# Altium PCB СхемаПолумостоваяРазводка.PcbDoc
Units mil, origin at the board's own origin, x right, y up, seen from the top; angles counter-clockwise.
Board outline 6000 x 4000 mil, 2 copper layers (Top Layer, Bottom Layer); 84 components, 45 nets, 186 pads, 0 vias.
Unrouted connection lines stored in the file: 133.
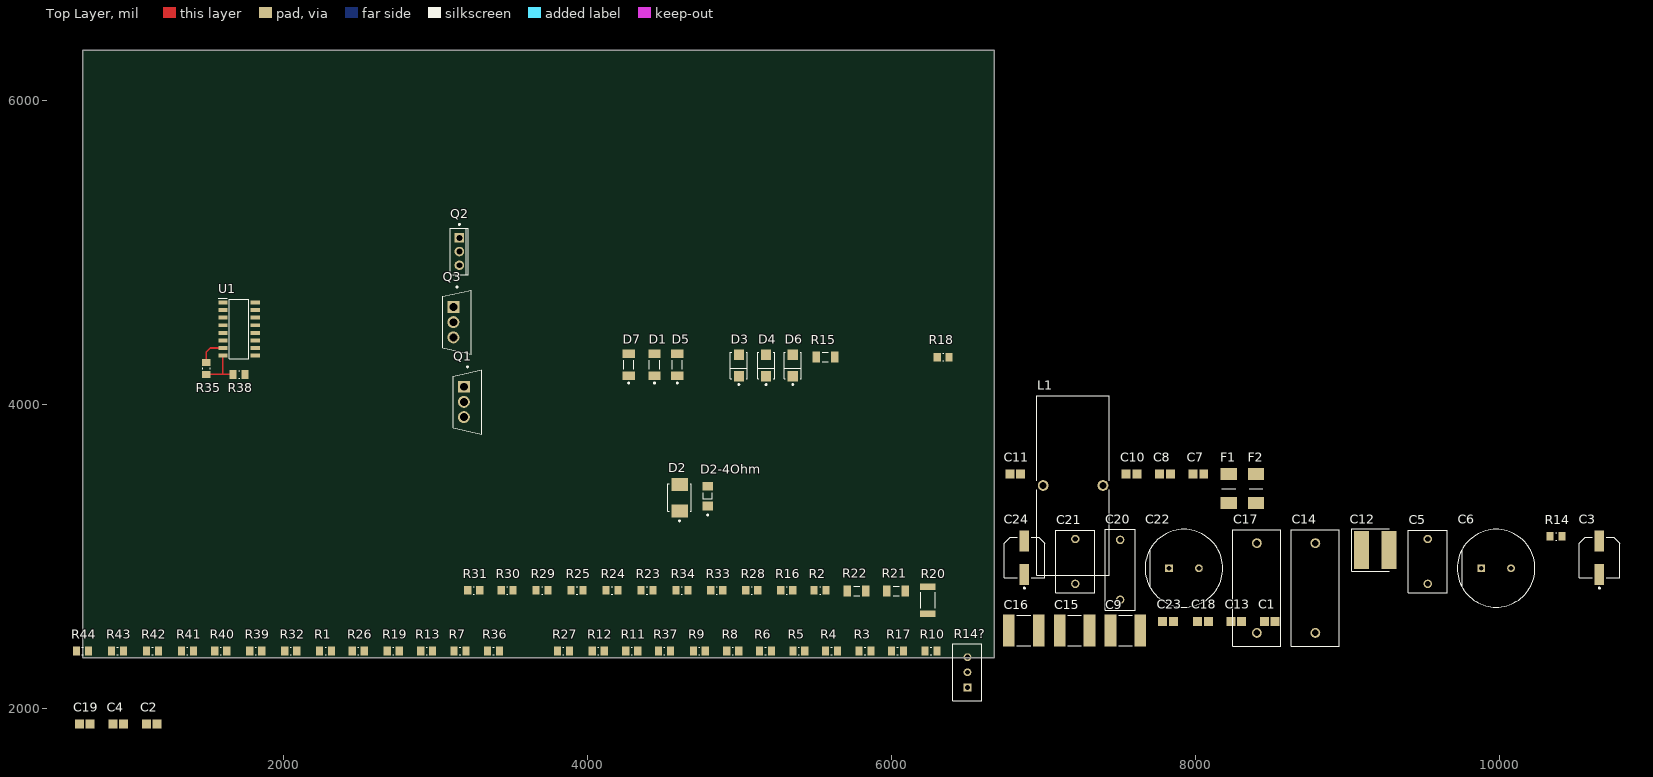
[diagram p0: Top Layer view]
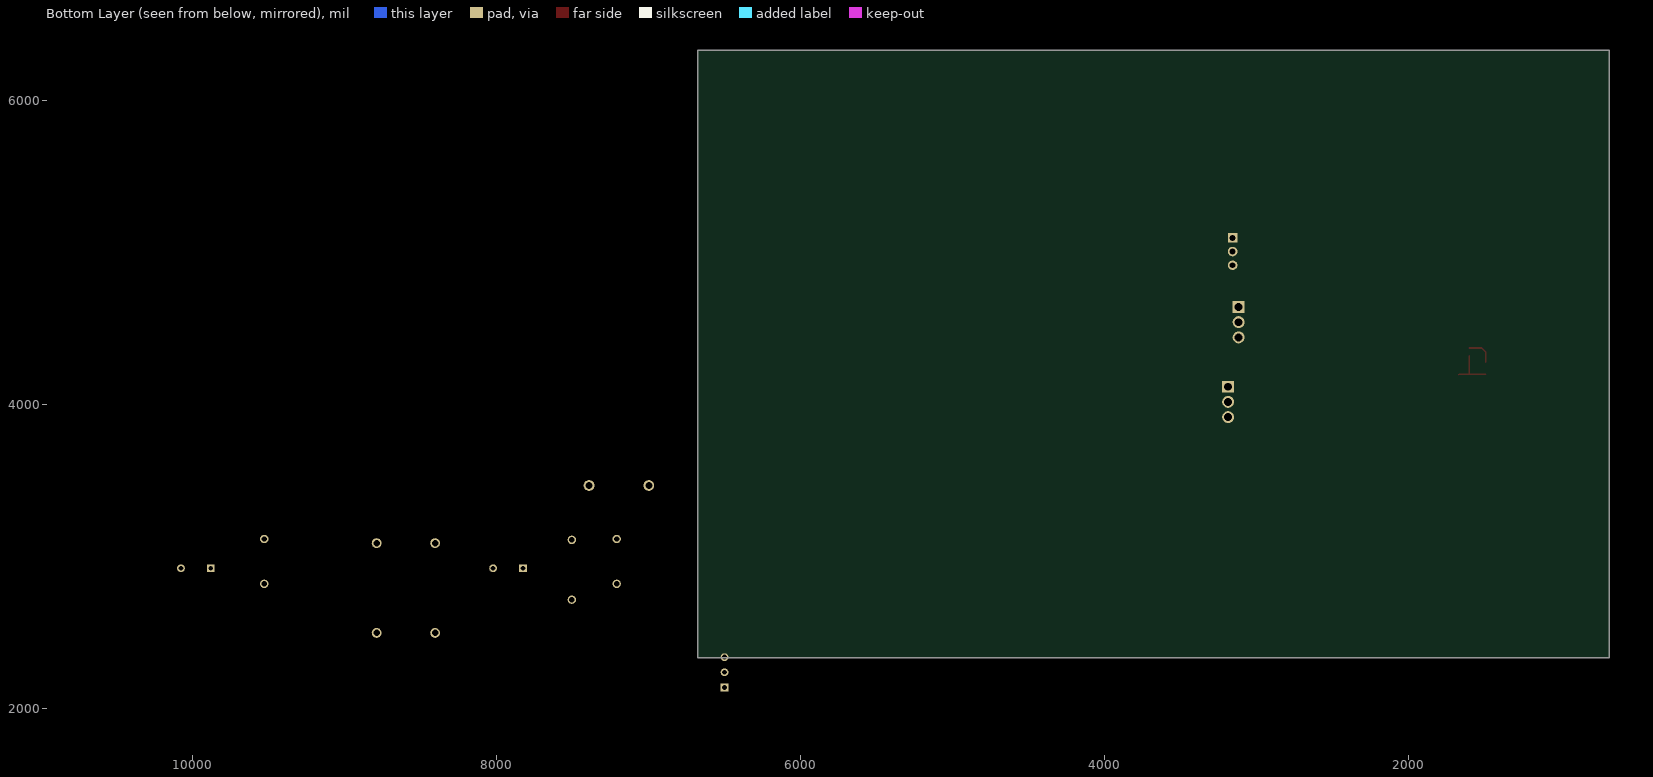
[diagram p1: Bottom Layer view, seen from below]

## Layer stack, top to bottom
Top Solder: solder mask 0.4, Solder Resist, Dk 3.5
Top Layer: signal copper 1.4
Dielectric 1: dielectric 12.6, FR-4, Dk 4.8
Bottom Layer: signal copper 1.4
Bottom Solder: solder mask 0.4, Solder Resist, Dk 3.5

## Board outline
675,2330 6675,2330 6675,6330 675,6330

## Design rules (kind name [scope] priority, off if disabled: settings)
Clearance [All] p1: gap=10 ignorepadtopadclearanceinfootprint=FALSE
PolygonConnect [All] p1: connectstyle=Relief reliefconductorwidth=10 reliefentries=4 polygonreliefangle="90 Angle" airgapwidth=10
RoutingVias [All] p1: holewidth=28 width=50 viastyle="Through Hole" minholewidth=28 minwidth=50 maxholewidth=28 maxwidth=50
SolderMaskExpansion [All] p1: expansion=4 istentingtop=FALSE
SupplyNets "Schematic Supply Nets_1" [InNet('aGND')] p1: voltage=0.000
SupplyNets "Schematic Supply Nets" [InNet('GND')] p2: voltage=0.000
Width [All] p1: maxlimit=10 minlimit=10 preferedwidth=10
30 further rules are at their usual default settings.

## Components (designator, comment, footprint, x,y, rotation, side; value= is the part's Value field where it differs from the comment)
C1 "2u2" CAPC2013X145X50ML20T25 8490,2570 r0 top
C2 "15p" CAPC2013X145X50ML20T25 1130,1895 r0 top
C3 "220u 16V" FP-OS-CON-SMT-C6-MFG 10660,2990 r90 top
C4 "220p" CAPC2013X145X50ML20T25 910,1895 r0 top
C5 "0.068Uf" WCAP-FTX2_L10W6H12_CS 9530,2965 r90 top
C6 "470uF 63V" FP-RAD-TH-D_12_5_0_5-L_20-MFG 9980,2920 r0 top
C7 "2n2" CAPC2013X145X50ML20T25 8020,3540 r0 top
C8 "2n2" CAPC2013X145X50ML20T25 7800,3540 r0 top
C9 "22uF" CAPC5950X255X70LL75T35 7540,2510 r0 top
C10 "2n2" CAPC2013X145X50ML20T25 7580,3540 r0 top
C11 "2n2" CAPC2013X145X50ML20T25 6815,3540 r0 top
C12 "TAN 47u" CAPPC5760X640N 9185,3040 r0 top
C13 "2u2" CAPC2013X145X50ML20T25 8270,2570 r0 top
C14 "1uf 100V" WCAP-FTBP_L18W7H13 8790,2790 r90 top
C15 "22uF" CAPC5950X255X70LL75T35 7205,2510 r0 top
C16 "22uF" CAPC5950X255X70LL75T35 6870,2510 r0 top
C17 "1uf 100V" WCAP-FTBP_L18W7H13 8405,2790 r90 top
C18 "2u2" CAPC2013X145X50ML20T25 8050,2570 r0 top
C19 "220p" CAPC2013X145X50ML20T25 690,1895 r0 top
C20 "0.022Uf" WCAP-FTX2_L13W4.5H9.5 7505,2910 r90 top
C21 "680nF" WCAP-FTX2_L10W6H12_CS 7210,2965 r90 top
C22 "470uF 63V" FP-RAD-TH-D_12_5_0_5-L_20-MFG 7925,2920 r0 top
C23 "2u2" CAPC2013X145X50ML20T25 7820,2570 r0 top
C24 "220u 16V" FP-OS-CON-SMT-C6-MFG 6875,2990 r90 top
D1 "BZV55C5V6" FP-DO-213AA-MFG 4440,4260 r90 top
D2 "MURS120T3G" FP-403A-03-MFG 4605,3385 r90 top
D2-4Ohm "BAV102" FP-100AD-IPC_A 4790,3395 r90 top
D3 "ES1D-E3/61T" FP-95400-MFG 4995,4255 r90 top value="10 pF"
D4 "ES1D-E3/61T" FP-95400-MFG 5175,4255 r90 top value="10 pF"
D5 "BZV55C12" FP-DO-213AA-MFG 4590,4260 r90 top
D6 "ES1D-E3/61T" FP-95400-MFG 5350,4255 r90 top value="10 pF"
D7 "BZV55C5V6" FP-DO-213AA-MFG 4270,4260 r90 top
F1 "10A" FUSC6025X270N 8220,3445 r90 top
F2 "10A" FUSC6025X270N 8400,3445 r90 top
L1 "10mH 30A" 744151 7195,3465 r90 top
Q1 "IRFB5615PBF" FP-PG-TO220-3-MFG 3209.02,4015 r0 top
Q2 "BD139" ONSC-TO-225-3-77-09 3155,5004.84 r0 top
Q3 "IRFB5615PBF" FP-PG-TO220-3-MFG 3140,4540 r0 top
R1 "68K" RESC2013X60X35ML10T20 2275,2375 r0 top
R2 "0R" RESC2013X60X35ML10T20 5530,2775 r0 top
R3 "2K2" RESC2013X60X35ML10T20 5825,2375 r0 top
R4 "2K2" RESC2013X60X35ML10T20 5605,2375 r0 top
R5 "2K2" RESC2013X60X35ML10T20 5390,2375 r0 top
R6 "2K2" RESC2013X60X35ML10T20 5170,2375 r0 top
R7 "0K5" RESC2013X60X35ML10T20 3160,2375 r0 top
R8 "2K2" RESC2013X60X35ML10T20 4955,2375 r0 top
R9 "2K2" RESC2013X60X35ML10T20 4735,2375 r0 top
R10 "1K8" RESC2013X60X35ML10T20 6260,2375 r0 top
R11 "8K2" RESC2013X60X35ML10T20 4290,2375 r0 top
R12 "8K2" RESC2013X60X35ML10T20 4070,2375 r0 top
R13 "18K" RESC2013X60X35ML10T20 2940,2375 r0 top
R14 "220R" RESC2013X60X35ML10T20 10375,3130 r0 top
R14? "3296W-220R" BOUR-3296W-1-3 6500,2235 r90 top
R15 "2R2" RESC3116X65X40ML10T20 5565,4310 r0 top
R16 "4R7" RESC2013X60X35ML10T20 5310,2775 r0 top
R17 "1K5" RESC2013X60X35ML10T20 6040,2375 r0 top
R18 "4R7" RESC2013X60X35ML10T20 6340,4310 r0 top
R19 "0K5" RESC2013X60X35ML10T20 2720,2375 r0 top
R20 "0R" RESC2010(5025)_L 6240,2710 r90 top value="1500.00 Ohm"
R21 "2R2" RESC3116X65X40ML10T20 6030,2770 r0 top
R22 "2R2" RESC3116X65X40ML10T20 5770,2770 r0 top
R23 "10R" RESC2013X60X35ML10T20 4390,2775 r0 top
R24 "10R" RESC2013X60X35ML10T20 4160,2775 r0 top
R25 "10R" RESC2013X60X35ML10T20 3930,2775 r0 top
R26 "0K5" RESC2013X60X35ML10T20 2490,2375 r0 top
R27 "8K2" RESC2013X60X35ML10T20 3840,2375 r0 top
R28 "4R7" RESC2013X60X35ML10T20 5080,2775 r0 top
R29 "10R" RESC2013X60X35ML10T20 3700,2775 r0 top
R30 "10R" RESC2013X60X35ML10T20 3470,2775 r0 top
R31 "10R" RESC2013X60X35ML10T20 3250,2775 r0 top
R32 "0K5" RESC2013X60X35ML10T20 2045,2375 r0 top
R33 "4R7" RESC2013X60X35ML10T20 4850,2775 r0 top
R34 "10R" RESC2013X60X35ML10T20 4620,2775 r0 top
R35 "7K5" RESC2013X60X35ML10T20 1490,4235.63 r90 top
R36 "7K5" RESC2013X60X35ML10T20 3380,2375 r0 top
R37 "2K7" RESC2013X60X35ML10T20 4505,2375 r0 top
R38 "2K4" RESC2013X60X35ML10T20 1705.63,4195 r0 top
R39 "1K" RESC2013X60X35ML10T20 1815,2375 r0 top
R40 "1K" RESC2013X60X35ML10T20 1585,2375 r0 top
R41 "1K" RESC2013X60X35ML10T20 1365,2375 r0 top
R42 "1K" RESC2013X60X35ML10T20 1135,2375 r0 top
R43 "1K" RESC2013X60X35ML10T20 905,2375 r0 top
R44 "1K" RESC2013X60X35ML10T20 675,2375 r0 top
U1 "IRS2092STRPBF" SOIC127P600X175-16N 1705,4495 r0 top

## Footprints (in the part's own frame and the unit in brackets; to place one, negate y for a bottom-side part, rotate by r counter-clockwise, add the part's x,y. Pads: shape width x height; smd on the part's side, far side on the other; paste and mask are expansions set on the pad)
744151 [mm] "THT Leaded Toroidal Storage Choke, body 30x12.1mm"
  round 1.8 hole 1.2: 1(0,5) 2(0,-5)
  silkscreen extent -15,-6.05 15,6.05, body extent -13.06,-5.5 13.06,5.5, height 25.56
BOUR-3296W-1-3 [mm] "THD, 3-Leads, Body 9.53x4.83mm, Pitch 2.54mm"
  rect 1.3x1.3 hole 0.8: 1(-2.54,0)
  round 1.3 hole 0.8: 2(0,0) 3(2.54,0)
  silkscreen extent -4.76,-2.41 4.76,2.42, body extent -4.76,-2.41 4.76,2.42, height 11.55
CAPC2013X145X50ML20T25 [mm] "Chip Capacitor, 2-Leads, Body 2.00x1.25mm, IPC Low Density"
  rect 1.5x1.55 smd: 1(-0.9,0) 2(0.9,0)
  body extent -1.1,-0.72 1.1,0.72, height 1.45
CAPC5950X255X70LL75T35 [mm] "Chip Capacitor, 2-Leads, Body 6.65x5.40mm, IPC High Density"
  rect 1.95x5.3 smd: 1(-2.5,0) 2(2.5,0)
  silkscreen extent -1.15,-2.55 1.15,2.55, body extent -3.32,-2.7 3.32,2.7, height 2.55
CAPPC5760X640N [mm]
  rect 2.55x6.4 smd: 1(-2.3,0) 2(2.3,0)
  silkscreen extent -3.93,-3.55 2.3,3.55, body extent -4.54,-3.02 3.05,3.02, height 6
FP-100AD-IPC_A [mm]
  rect 1.5x1.75 smd paste+0 mask+0: 1(-1.65,0) 2(1.65,0)
  silkscreen extent -3.3,-0.75 0.53,0.75, body extent -2.9,-1.38 2.9,1.38, height 0.25
FP-403A-03-MFG [mil]
  rect 85x107.99 smd paste+0 mask+0: 1(-87.01,0) 2(87.01,0)
  silkscreen extent -157,-78 91,78, body extent -133,-82 133,82, height 10
FP-95400-MFG [mm]
  rect 1.7x1.68 smd paste+0 mask+0: 1(-1.79,0) 2(1.79,0)
  silkscreen extent -3.32,-1.4 2.25,1.4, body extent -2.74,-1.5 2.74,1.5, height 0.25
FP-DO-213AA-MFG [mm]
  rect 1.4x2.03 smd paste+0 mask+0: 1(-1.84,0) 2(1.84,0)
  silkscreen extent -3.2,-0.85 0.76,0.85, body extent -2.64,-1.11 2.64,1.11, height 0.25
FP-OS-CON-SMT-C6-MFG [mm]
  rect 3.5x1.6 smd paste+0 mask+0: 1(-2.8,0) 2(2.8,0)
  silkscreen extent -5.22,-3.4 3.4,3.4, body extent -4.8,-3.65 4.8,3.65, height 0.25
FP-PG-TO220-3-MFG [mm]
  rect 2x2 hole 1.3 paste-2539.97 mask+0: 1(-0.61,2.54)
  round 2 hole 1.3 paste-2539.97 mask+0: 2(-0.61,0) 3(-0.61,-2.54)
  silkscreen extent -2.41,-5.38 2.41,6, body extent -2.51,-5.6 2.51,5.6, height 0.25
FP-RAD-TH-D_12_5_0_5-L_20-MFG [mm]
  rect 1.3x1.3 hole 0.8 paste-2539.97 mask+0: 1(-2.5,0)
  round 1.3 hole 0.8 paste-2539.97 mask+0: 2(2.5,0)
  silkscreen extent -6.5,-6.5 6.5,6.5, body extent -6.6,-6.6 6.6,6.6, height 0.25
FUSC6025X270N [mm]
  rect 2.04x2.72 smd: 1(-2.44,0) 2(2.44,0)
  silkscreen extent 0,-1.15 0,1.15, body extent -3,-1.25 3,1.25, height 2.7
ONSC-TO-225-3-77-09 [mm] "FM, 3-Leads, Body 7.8x3mm, Pitch 2.29mm"
  rect 1.6x1.6 hole 1: 1(0,2.29)
  round 1.6 hole 1: 2(0,0) 3(0,-2.29)
  silkscreen extent -1.49,-3.9 1.51,4.67, body extent -1.49,-3.9 1.51,3.9, height 13.64
RESC2010(5025)_L [mm] "Chip Resistor, Body 5.0x2.5mm, IPC High Density"
  rect 1.05x2.6 smd: 1(-2.25,0) 2(2.25,0)
  silkscreen extent -1.35,-1.2 1.35,1.2, body extent -2.6,-1.35 2.6,1.35, height 0.71
RESC2013X60X35ML10T20 [mm] "Chip Resistor, 2-Leads, Body 2.1x1.35mm, IPC Low Density"
  rect 1.2x1.45 smd: 1(-1,0) 2(1,0)
  silkscreen extent -0.1,-0.63 0.1,0.63, body extent -1.05,-0.68 1.05,0.67, height 0.6
RESC3116X65X40ML10T20 [mm] "Chip Resistor, 2-Leads, Body 3.10x1.60mm, IPC Low Density"
  rect 1.25x1.8 smd: 1(-1.525,0) 2(1.525,0)
  silkscreen extent -0.5,-0.8 0.5,0.8, body extent -1.6,-0.85 1.6,0.85, height 0.65
SOIC127P600X175-16N [mm]
  rect 1.522x0.65 smd: 1(-2.714,4.445) 2(-2.714,3.175) 3(-2.714,1.905) 4(-2.714,0.635) 5(-2.714,-0.635) 6(-2.714,-1.905) 7(-2.714,-3.175) 8(-2.714,-4.445) 9(2.714,-4.445) 10(2.714,-3.175) 11(2.714,-1.905) 12(2.714,-0.635) 13(2.714,0.635) 14(2.714,1.905) 15(2.714,3.175) 16(2.714,4.445)
  silkscreen extent -3.47,-4.94 1.6,5.12, body extent 0,0 0,0
WCAP-FTBP_L18W7H13 [mm] "Film Capacitors, 18x7x13mm"
  round 1.65 hole 1.1: 1(-7.5,0) 2(7.5,0)
  silkscreen extent -9.75,-4 9.75,4, body extent -9,-3.5 9,3.5, height 13.05
WCAP-FTX2_L10W6H12_CS [mm] "Film Capacitors, 10x6x12mm"
  round 1.4 hole 0.9: 1(-3.75,0) 2(3.75,0)
  silkscreen extent -5.25,-3.25 5.25,3.25, body extent -5,-3 5,3, height 12.05
WCAP-FTX2_L13W4.5H9.5 [mm] "Film Capacitors, 13x4.5x9.5mm"
  round 1.4 hole 0.9: 1(-5,0) 2(5,0)
  silkscreen extent -6.75,-2.5 6.75,2.5, body extent -6.5,-2.25 6.5,2.25, height 9.55

## Part data
C1 C2 C4 C7 C8 C10 C11 C13 C18 C19 C23: library part CMP-1036-04819-2, Manufacturer=Kemet, Part Number=C0805C225K9PACTU
C3 C24: library part CMP-05428-001013-1, "Conductive Polymer Aluminum Solid Capacitors (OS-CON) 220uF ±20% 16V", Capacitance=220uF, Case/Package=Radial, ESR (Equivalent Series Resistance)=22mR, Max Operating Temperature=125°C, Min Operating Temperature=-55°C, Tolerance=20%, Voltage Rating=16V, Life (Hours)=1000Hour, Mount="Surface Mount", Packaging="Tape and Reel"
C5 C21: library part CMP-03913-51400083-2, "890324022017CS Capacitor, Film, Polypropylene, 0.068Uf, 275Vac, Radial", Capacitance=68nF, Case/Package=Radial, Dielectric=PP, Insulation Resistance=30GΩ, Max Operating Temperature=105°C, Min Operating Temperature=-40°C, Tolerance=10%, Voltage Rating=275V, Dielectric Material=PP, Height=12mm, Height - Seated (Max)=12.4968mm, Hole Diameter=900µm, Lead Pitch=7.493mm, Length=10mm, Mount="Through Hole", NexarPartId=51400083, Packaging=Carton, Pin Length=4mm, Pitch=7.5mm, REACH SVHC=Unknown, RoHS=Compliant, Termination="PC Pins", Voltage Rating (AC)=275V, Voltage Rating (DC)=275V, Width=6mm
C6 C22: library part CMP-05427-001729-1, "Aluminum Electrolytic Capacitors (Radial Lead Type) AEC-Q200 Qualified 470uF ±20% 63V", Capacitance=470uF, Case/Package=Radial, Max Operating Temperature=105°C, Min Operating Temperature=-55°C, Package Quantity=500, Ripple Current=640mA, Tolerance=20%, Voltage Rating (DC)=63V, Construction=RADIAL, Contact Plating=Tin, Diameter=12.5mm, Height=20mm, Lead Diameter=0.6mm, Lead Pitch=5mm, Lead/Base Style=Straight, Length=20mm, Life (Hours)=2000Hour, Mount="Through Hole", Packaging="Ammo Pack", Radiation Hardening=No, RoHS Compliant=Yes, Series=NHG, Termination=Radial
C9 C15 C16: library part CMP-1664-00005-1, "Chip Capacitor, 22 uF, +/- 10%, 25 V, -55 to 125 degC, 2220 (5650 Metric), RoHS, Tape and Reel", Case Code (Imperial)=1812, Case Code (Metric)=4532, Current Rating="20 A", Max Operating Temperature="85 degC", Min Operating Temperature="-40 degC", Nominal Supply Voltage="33 V", Package Quantity=1000, Resistance="200 mohm", Case\Package=1812, ComponentLink1Description="Manufacturer URL", ComponentLink1URL=http://www.kemet.com/, ComponentLink2Description=Datasheet, ComponentLink2URL=http://www.mouser.com/ds/2/212/KEM_C1013_X7R_FT-CAP_SMD-346914.pdf, DatasheetVersion=Feb-16, Height="2 mm", Length="4.73 mm", Mount="Surface Mount", PackageDescription="2-Pin Surface Mount Device, Body 5.9 x 5 mm", PackageReference=2220, Packaging="Tape and Reel", REACH SVHC="No SVHC", RoHSCompliant=true, Voltage Rating="33 V", Width="3.41 mm"
C12: library part 597D476X0050Z2T, "Capacitor Polarised", Manufacturer_Name=Vishay, Mouser Part Number=71-597D476X0050Z2T, Arrow Part Number=597D476X0050Z2T, Arrow Price/Stock=https://www.arrow.com/en/products/597d476x0050z2t/vishay?region=nac, Datasheet Link=http://www.vishay.com/doc?40047, Height=6.4mm, Manufacturer_Part_Number=597D476X0050Z2T, Mouser Price/Stock=https://www.mouser.co.uk/ProductDetail/Vishay-Sprague/597D476X0050Z2T?qs=cyBetVxIfqkOZXvQZwfF4Q%3D%3D
C14 C17: library part CMP-03913-89437293-1, "890273325009CS Cap, 1Uf, 250V, Film, Radial Rohs Compliant: Yes", Capacitance=1µF, ESR (Equivalent Series Resistance)=22.08mΩ, Voltage Rating=250V, Height=13mm, Length=18mm, NexarPartId=89437293, Packaging=Carton, Pin Length=4mm, Pitch=15mm, RoHS=Compliant, Width=7mm
C20: library part CMP-03913-52220317-2, "890324023011 Film Capacitor, Wcap-Ftx2 Series, 0.022 F, 10%, Pp (Polypropylene), 275 Vac Rohs Compliant: Yes", Capacitance=22nF, Case/Package=Radial, Dielectric=PP, Insulation Resistance=30GΩ, Max Operating Temperature=105°C, Min Operating Temperature=-40°C, Tolerance=10%, Voltage Rating=275V, Dielectric Material=PP, Height=9.5mm, Height - Seated (Max)=10.0076mm, Hole Diameter=900µm, Lead Pitch=10.0076mm, Length=13mm, Mount="Through Hole", NexarPartId=52220317, Packaging=Bulk, Pin Length=18mm, Pitch=10mm, REACH SVHC=Unknown, RoHS=Compliant, Termination="PC Pins", Voltage Rating (AC)=275V, Voltage Rating (DC)=275V, Width=4.5mm
D1 D7: library part CMP-00252-16640727-1, "BZV55C5V6 Diode Zener Single 5.6V 2% 3.33mW 2-Pin MELF DO-213AA Bag", Max Operating Temperature=175°C, Min Operating Temperature=-65°C, Test Current=5mA, Tolerance=7%, Zener Voltage=5.6V, Element Configuration=Single, Lifecycle Status=Production, Mount="Surface Mount", NexarPartId=16640727, Number of Pins=2, RoHS=Non-Compliant, Voltage Tolerance=7%
D2: library part CMP-0902-00001-3, "DIODE GEN PURP 200V 2A SMB", Average Rectified Current=2A, Case/Package=SMB, Current Rating=1A, Forward Voltage=875mV, Max Forward Surge Current (Ifsm)=40A, Max Operating Temperature=175°C, Max Repetitive Reverse Voltage (Vrrm)=200V, Min Operating Temperature=-65°C, Package Quantity=2500, Peak Reverse Current=2uA, Contact Plating=Tin, Element Configuration=Single, Forward Current=2A, Height=2.13mm, Lead Free="Lead Free", Length=4.32mm, Max Reverse Voltage (DC)=200V, Max Surge Current=40A, Number of Pins=2, Output Current=1A, Packaging="Tape and Reel", Peak Non-Repetitive Surge Current=40A, Polarity=Standard, Radiation Hardening=No, REACH SVHC="No SVHC", Recovery Time=35ns, Reverse Recovery Time=35ns, Reverse Voltage=200V, Voltage Rating (DC)=200V, Width=3.56mm
D2-4Ohm: library part CMP-00278-84324523-1, "BAV102 Diode Ultra Fast Recovery Rectifier 200V 0.2A 2-Pin LL-34 T/R", Average Rectified Current=200mA, Capacitance=5pF, Case/Package=MELF, Forward Voltage=1.25V, Manufacturer Lifecycle Status=ACTIVE, Max Forward Surge Current (Ifsm)=1A, Max Junction Temperature (Tj)=200°C, Max Repetitive Reverse Voltage (Vrrm)=200V, Max Reverse Voltage (DC)=150V, Max Surge Current=4A, Min Operating Temperature=-65°C, Peak Reverse Current=100nA, Power Dissipation=500mW, Current Rating=200mA, Element Configuration=Single, Forward Current=200mA, Height=1.5mm, Lead Free="Lead Free", Lifecycle Status=Production, Max Operating Temperature=200°C, Mount="Surface Mount", NexarPartId=84324523, Number of Pins=34, Output Current=200mA, Packaging="Cut Tape", Peak Non-Repetitive Surge Current=4A, Polarity=Standard, Radiation Hardening=No, Recovery Time=50ns, Reverse Recovery Time=50ns, Reverse Voltage=200V, RoHS=Compliant, Schedule B="8541100080, 8541100080", Voltage Rating (DC)=200V, Weight=51.84mg
D3 D4 D6: library part CMP-02540-000037-1, "DIODE GEN PURP 200V 1A DO214AC", Capacitance="10 pF", Forward Current=1A, Manufacturer=Vishay, Max Junction Temp=+150°C, Max Repetitive Reverse Voltage=200V, Max Surge Forward Current=30A, Package=95400, Peak Reverse Current=5uA, Temperature="-55°C to +150°C", Temperature Range Low=-55°C, Automotive=No, Category=Diode, ComponentLink2Description=Datasheet, ComponentLink2URL=http://www.vishay.com/docs/88586/es1.pdf, Device Class L1="Discrete Semiconductors", Device Class L2=Diodes, Device Class L3="Rectifier Diodes", Digikey Description="DIODE GEN PURP 200V 1A DO214AC", Footprint Url=http://www.vishay.com/docs/95400/sma.pdf, Height=2.29mm, Lead Free=Yes, Manufacturer Part Number=ES1D-E3/61T, Mouser Description="Ultrafast Rectifier, Plastic Surface Mount, 1 A, 200 VDC, DO0214AC (SMA), RoHS", Octopart=https://octopart.com/es1d-e3%2F61t-vishay-39550266, RoHS=TRUE, Standoff Height=0mm, Temperature Range High=+150°C
D5: library part CMP-00252-75067900-1, "BZV55C12 Zener Diode Single 12.05V 5% 25Ohm 500mW 2-Pin DO-213AA", Max Operating Temperature=175°C, Max Reverse Leakage Current=100nA, Min Operating Temperature=-65°C, Power Dissipation=3.33mW, Reverse Voltage=8V, Zener Voltage=12.05V, Height=1.7mm, NexarPartId=75067900
F1 F2: library part CCF1N10TTE, "Fuse", Manufacturer_Name="KOA Speer", Mouser Part Number=660-CCF1N10TTE, Arrow Part Number=CCF1N10TTE, Arrow Price/Stock=https://www.arrow.com/en/products/ccf1n10tte/koa-speer-electronics?region=nac, Datasheet Link=https://componentsearchengine.com/Datasheets/1/CCF1N10TTE.pdf, Height=2.7mm, Manufacturer_Part_Number=CCF1N10TTE, Mouser Price/Stock=https://www.mouser.co.uk/ProductDetail/KOA-Speer/CCF1N10TTE?qs=rZB7yXOqaotLjZpPUC%2Fp3g%3D%3D
L1: library part CMP-03913-22803296-1, "744151 48 µH ±20% Ferrite Toroidal Inductor, 8.1A Idc, 25mO Rdc WE-SI", Ambient Temperature Range High=65°C, Ambient Temperature Range Low=-40°C, Current Rating=8.1A, Inductance=48µH, Max DC Current=5A, Max Operating Temperature=105°C, Series Resistance=25mΩ, Tolerance=20%, Core Material=Ferrite, Depth=12mm, Diameter=30mm, Height=12mm, Lead Pitch=10mm, Length=30mm, Min Operating Temperature=-40°C, Mount=Wire, NexarPartId=22803296, Pin Length=12mm, Pitch=1mm, RoHS=Compliant, Width=12.1mm
Q1 Q3: library part CMP-32901-000279-1, "MOSFET N-CH 150V 35A TO-220AB", Case/Package=TO-220, Continuous Drain Current (ID)=35A, Drain to Source Resistance=39mR, Drain to Source Voltage (Vdss)=150V, Gate to Source Voltage (Vgs)=20V, Input Capacitance=1.75nF, Max Operating Temperature=175°C, Max Power Dissipation=144W, Min Operating Temperature=-55°C, Threshold Voltage=3V, Element Configuration=Single, Halogen Free="Not Halogen Free", Height=0.65inch, Lead Free="Contains Lead", Length=0.42inch, Max Dual Supply Voltage=150V, Mount="Through Hole", Number of Pins=3, Packaging=Rail/Tube, Power Dissipation=144W, Rds On Max=39mR, REACH SVHC="No SVHC", RoHS Compliant=Yes, Turn-Off Delay Time=17.1ns, Turn-On Delay Time=8.6ns, Width=0.19inch
Q2: library part CMP-1048-01271-1, "Plastic Medium-Power Silicon NPN Transistor, 3-Pin TO-225, Bulk Box", Manufacturer="On Semiconductor", ComponentLink1Description="Manufacturer URL", ComponentLink1URL=http://www.onsemi.com/, ComponentLink2Description=Datasheet, ComponentLink2URL=http://www.onsemi.com/pub_link/Collateral/BD135-D.PDF, ComponentLink3Description="Package Specification", ComponentLink3URL=http://www.onsemi.com/pub_link/Collateral/77-09.PDF, DatasheetVersion="Rev. 16", IC Continuous (A)=1.5, Mounting Technology="Through Hole", PackageDescription="3-Pin Flange Mount, Vertical Straight Lead, Body 7.6 x 2.7 mm, Pitch 2.29 mm", PackageReference=TO-225-3-77-09, PackageVersion="Rev. AC, 12/2013", Packing="Bulk Box", PartNumber=BD139, Polarity=NPN, RoHS=FALSE
R1 R3 R4 R5 R6 R8 R9 R11 R12 R13 R17 R27 R35 R36 R37: library part CMP-2100-03671-1, "Chip Resistor, 1 KOhm, +/- 1%, 125 mW, -55 to 155 degC, 0805 (2012 Metric), RoHS, Tape and Reel", Case Code (Imperial)=0805, Case Code (Metric)=2012, Manufacturer=Yageo, Max Operating Temperature=155degC, Max Power Dissipation=125mW, Min Operating Temperature=-55degC, Package Description="2-Pin Surface Mounted Device, Body 2 x 1.25 mm", Package Quantity=1, Resistance=1.5KOhm, Temperature Coefficient=100ppm/degreesC, Tolerance=1%, Voltage Rating=150V, Case/Package=0805, Composition=ThickFilm, Datasheet URL=http://www.yageo.com/NewPortal/yageodocoutput?fileName=/pdf/R-Chip/PYu-RC_Group_51_RoHS_L_5.pdf, Datasheet Version="Rev. 5, 10/2016", Depth=1.25mm, Height=0.024inch, Lead Free=LeadFree, Length=0.079inch, Manufacturer URL=http://www.yageo.com/, Military Standard=Not, Number of Pins=2, Number of Terminations=2, Package Reference=0805, Packaging=TapeandReel, Power Rating=125mW, REACH SVHC=Unknown, RoHSCompliant=true, Termination=SMD/SMT, Voltage Rating (DC)=150V, Width=0.049inch
R2 R7 R14 R16 R18 R19 R23 R24 R25 R26 R28 R29 R30 R31 R32 R33 R34 R38 R39 R40 R41 R42 R43 R44: library part CMP-2100-03671-1, "Chip Resistor, 1 KOhm, +/- 1%, 125 mW, -55 to 155 degC, 0805 (2012 Metric), RoHS, Tape and Reel", Case Code (Imperial)=0805, Case Code (Metric)=2012, Manufacturer=Yageo, Max Operating Temperature=155degC, Max Power Dissipation=125mW, Min Operating Temperature=-55degC, Package Description="2-Pin Surface Mounted Device, Body 2 x 1.25 mm", Package Quantity=1, Resistance=1KOhm, Temperature Coefficient=100ppm/degreesC, Tolerance=1%, Voltage Rating=150V, Case/Package=0805, Composition=ThickFilm, Datasheet URL=http://www.yageo.com/NewPortal/yageodocoutput?fileName=/pdf/R-Chip/PYu-RC_Group_51_RoHS_L_5.pdf, Datasheet Version="Rev. 5, 10/2016", Depth=1.25mm, Height=0.024inch, Lead Free=LeadFree, Length=0.079inch, Manufacturer URL=http://www.yageo.com/, Military Standard=Not, Number of Pins=2, Number of Terminations=2, Package Reference=0805, Packaging=TapeandReel, Power Rating=125mW, REACH SVHC=Unknown, RoHSCompliant=true, Termination=SMD/SMT, Voltage Rating (DC)=150V, Width=0.049inch
R10: library part CMP-2100-03671-1, "Chip Resistor, 1 KOhm, +/- 1%, 125 mW, -55 to 155 degC, 0805 (2012 Metric), RoHS, Tape and Reel", Case Code (Imperial)=0805, Case Code (Metric)=2012, Manufacturer=Yageo, Max Operating Temperature=155degC, Max Power Dissipation=125mW, Min Operating Temperature=-55degC, Package Description="2-Pin Surface Mounted Device, Body 2 x 1.25 mm", Package Quantity=1, Resistance=1.8KOhm, Temperature Coefficient=100ppm/degreesC, Tolerance=1%, Voltage Rating=150V, Case/Package=0805, Composition=ThickFilm, Datasheet URL=http://www.yageo.com/NewPortal/yageodocoutput?fileName=/pdf/R-Chip/PYu-RC_Group_51_RoHS_L_5.pdf, Datasheet Version="Rev. 5, 10/2016", Depth=1.25mm, Height=0.024inch, Lead Free=LeadFree, Length=0.079inch, Manufacturer URL=http://www.yageo.com/, Military Standard=Not, Number of Pins=2, Number of Terminations=2, Package Reference=0805, Packaging=TapeandReel, Power Rating=125mW, REACH SVHC=Unknown, RoHSCompliant=true, Termination=SMD/SMT, Voltage Rating (DC)=150V, Width=0.049inch
R14?: library part CMP-1747-00002-1, "Square Trimpot(R) Trimming Potentiometer, 1000 Ohm, -55 to 125 degC, 3-Pin THD, RoHS, Tube", Case Code (Imperial)=0603, Case Code (Metric)=1608, Max Operating Temperature="155 degC", Min Operating Temperature="-55 degC", Package Quantity=5000, Power Rating="100 mW", Resistance="4.7 kohm", Tolerance=1%, Voltage Rating="75 V", Case\Package=0603, ComponentLink1Description="Manufacturer URL", ComponentLink1URL=http://www.bourns.com/, ComponentLink2Description=Datasheet, ComponentLink2URL=http://www.bourns.com/docs/Product-Datasheets/3296.pdf, DatasheetVersion=May-16, Height="0.45 mm", Length="1.6 mm", Mount="Surface Mount", PackageDescription="3-Pin Through Hole Device, Body 9.53 x 4.83 mm, Pitch 2.54 mm", PackageReference=3296W-1-3, Packaging="Tape and Reel", Pins=2, Radiation Hardening=No, REACH SVHC=Yes, RoHSCompliant=true, Weight="7.1E-05 oz", Width="0.8 mm"
R15 R21 R22: library part CMP-2100-03678-1, "Chip Resistor, 1 KOhm, +/- 1%, 0.25 W, -55 to 155 degC, 1206 (3216 Metric), RoHS, Tape and Reel", Case Code (Imperial)=1206, Case Code (Metric)=3216, Manufacturer=Yageo, Max Operating Temperature=155degC, Min Operating Temperature=-55degC, Package Description="2-Pin Surface Mount Device, Body 3.1 x 1.6 mm", Package Reference=1206.0, Power Rating=250mW, Resistance=1KOhm, Temperature Coefficient=100ppm/degreesC, Tolerance=1%, Voltage Rating=200V, Case/Package=1206, Composition=ThickFilm, Datasheet URL=http://www.yageo.com/NewPortal/yageodocoutput?fileName=/pdf/R-Chip/PYu-RC_Group_51_RoHS_L_5.pdf, Datasheet Version="Rev. 5, 10/2016", Depth=1.6mm, Height=0.55mm, Lead Free=LeadFree, Length=3.1mm, Manufacturer URL=http://www.yageo.com/, Military Standard=Not, Packaging=TapeandReel, REACH SVHC=Unknown, RoHSCompliant=true, Termination=SMD/SMT
R20: library part CMP-1017-00078-1, "1K5 0.75W 5% 2010 (5025 Metric)  SMD", Case-EIA=2010, Case-Metric=5025, Power="0.75 W", Tolerance="5 %", Technology=SMT
U1: "Integrated Circuit", Manufacturer_Name=Infineon, Mouser Part Number=942-IRS2092STRPBF, Arrow Part Number=IRS2092STRPBF, Arrow Price/Stock=https://www.arrow.com/en/products/irs2092strpbf/infineon-technologies-ag?region=nac, Datasheet Link=https://www.infineon.com/dgdl/irs2092.pdf?fileId=5546d462533600a401535675f1be2790, Height=1.75mm, Manufacturer_Part_Number=IRS2092STRPBF, Mouser Price/Stock=https://www.mouser.co.uk/ProductDetail/Infineon-Technologies/IRS2092STRPBF?qs=9%252BKlkBgLFf05m7YE8gkORQ%3D%3D

## Nets (pads, with @x,y where several pads share a name; then routed paths per layer and width w, separated by ;. In a path a pad name is that pad's centre, name@x,y a point inside that pad or via, vN(x,y) a via of type N, cw(c..) or ccw(c..) an arc to the next point about the centre after c; other vN are vias at no path point)
aGND: C1.1 C2.1 C3.1 C7.2 C8.2 C23.1 C24.2 D1.2 D7.1 R14.2 R34.1 U1.2
GND: C5.1 C6.1 C14.1 C17.1 C20.1 C21.2 C22.2 R22.2 R32.1 R34.2
NetC1_2: C1.2 R2.1 U1.1
NetC2_2: C2.2 R1.2 R7.2
NetC3_2: C3.2 D1.1 R2.2 R3.1 R5.1 R8.1
NetC4_1: C4.1 R16.2
NetC4_2: C4.2 C5.2 C6.2 D2.1 D4.1 F1.1 Q1.2 R4.2 R6.2 R9.2 R13.2
NetC7_1: C7.1 C12.2 R17.1
NetC8_1: C8.1 C11.2 U1.4
NetC9_1: C9.1 L1.1 Q1.3 Q3.2 R7.1 R11.1 R16.1 R28.2 U1.13
NetC9_2: C9.2 D3.1 R12.1 R13.1 U1.15
NetC10_1: C10.1 C11.1 R14.1
NetC10_2: C10.2 R1.1 R17.2 U1.3
NetC12_1: C12.1 R19.2
NetC13_1: C13.1 C18.1 C19.1 C21.1 C22.1 D5.2 D6.2 F2.1 Q3.3 R37.2 R38.2 R41.2 R44.2 U1.10
NetC13_2: C13.2 Q2.1 R20.1
NetC14_2: C14.2 C17.2 D4.2 D6.1 L1.2 R23.2 R24.2 R25.2 R26.2
NetC15_1: C15.1 C23.2 C24.1 D7.2 R39.1 R42.1 U1.6
NetC15_2: C15.2 U1.5
NetC16_1: C16.1 R33.1 U1.11
NetC16_2: C16.2 R21.1 R36.2 U1.12
NetC18_2: C18.2 D5.1 Q2.3 R27.1
NetC19_2: C19.2 R28.1
NetC20_2: C20.2 R30.1
NetD2_2: D2.2 R10.2 R12.2
NetD3_2: D3.2 R15.2
NetF1_2: F1.2
NetF2_2: F2.2
NetQ1_1: Q1.1 R18.2
NetQ2_2: Q2.2 R22.1 R27.2
NetQ3_1: Q3.1 R33.2
NetR3_2: R3.2 R4.1 R8.2 R9.1
NetR5_2: R5.2 R6.1
NetR10_1: R10.1 R11.2 U1.16
NetR15_1: R15.1 R20.2 R21.2
NetR18_1: R18.1 U1.14
NetR19_1: R19.1
NetR23_1: R23.1 R24.1 R25.1 R29.2 R30.2 R31.2
NetR26_1: R26.1 R32.2
NetR29_1: R29.1 R31.1
NetR35_1: R35.1 R38.1 U1.8 | length 301.8
  Top Layer w10: R35.1 1595,4196.26 ; U1.8 1598.15,4199.41 1595,4196.26 ; R38.1 1665,4196.26 1595,4196.26
NetR35_2: R35.2 U1.7 | length 188.5
  Top Layer w10: R35.2 1490,4345 1515,4370 U1.7
NetR36_1: R36.1 R37.1 U1.9
NetR39_2: R39.2 R40.1 R42.2 R43.1
NetR40_2: R40.2 R41.1 R43.2 R44.1
pads on no net: D2-4Ohm.1 D2-4Ohm.2 R14?.1 R14?.2 R14?.3